# Altium PCB ScreenAdapterBoard.PcbDoc
Units mil, origin at the board's own origin, x right, y up, seen from the top; angles counter-clockwise.
Board outline 1293.31 x 2254 mil, 2 copper layers (Top Layer, Bottom Layer); 9 components, 15 nets, 53 pads, 12 vias.
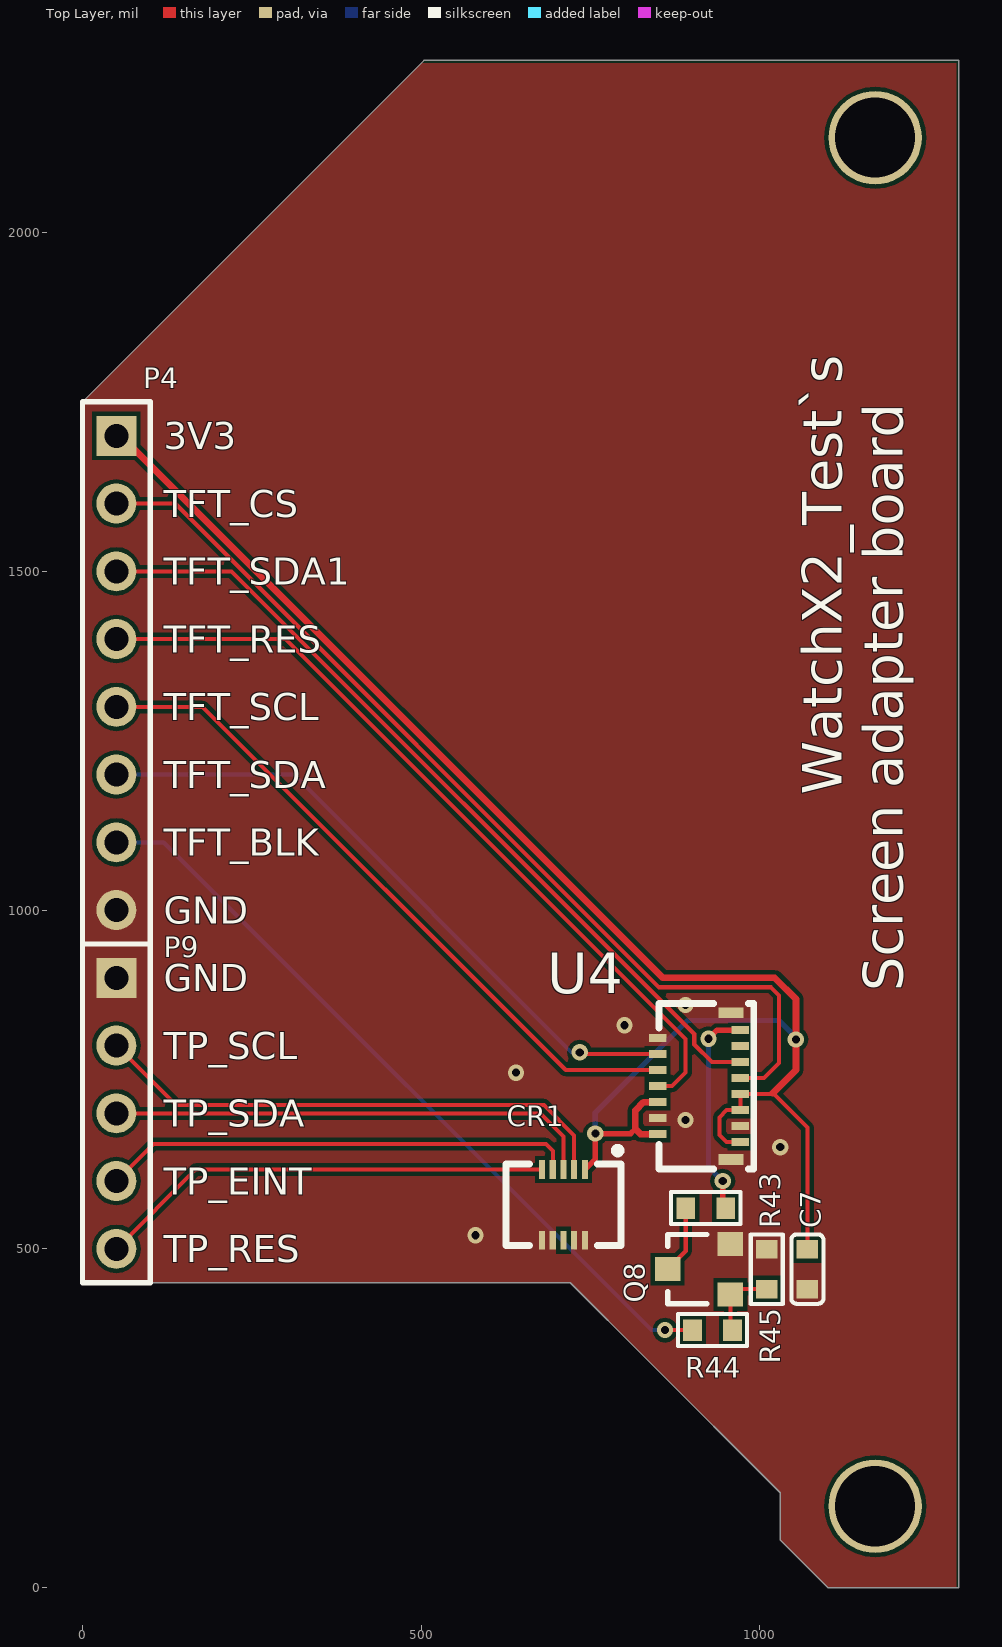
[diagram p0: Top Layer view]
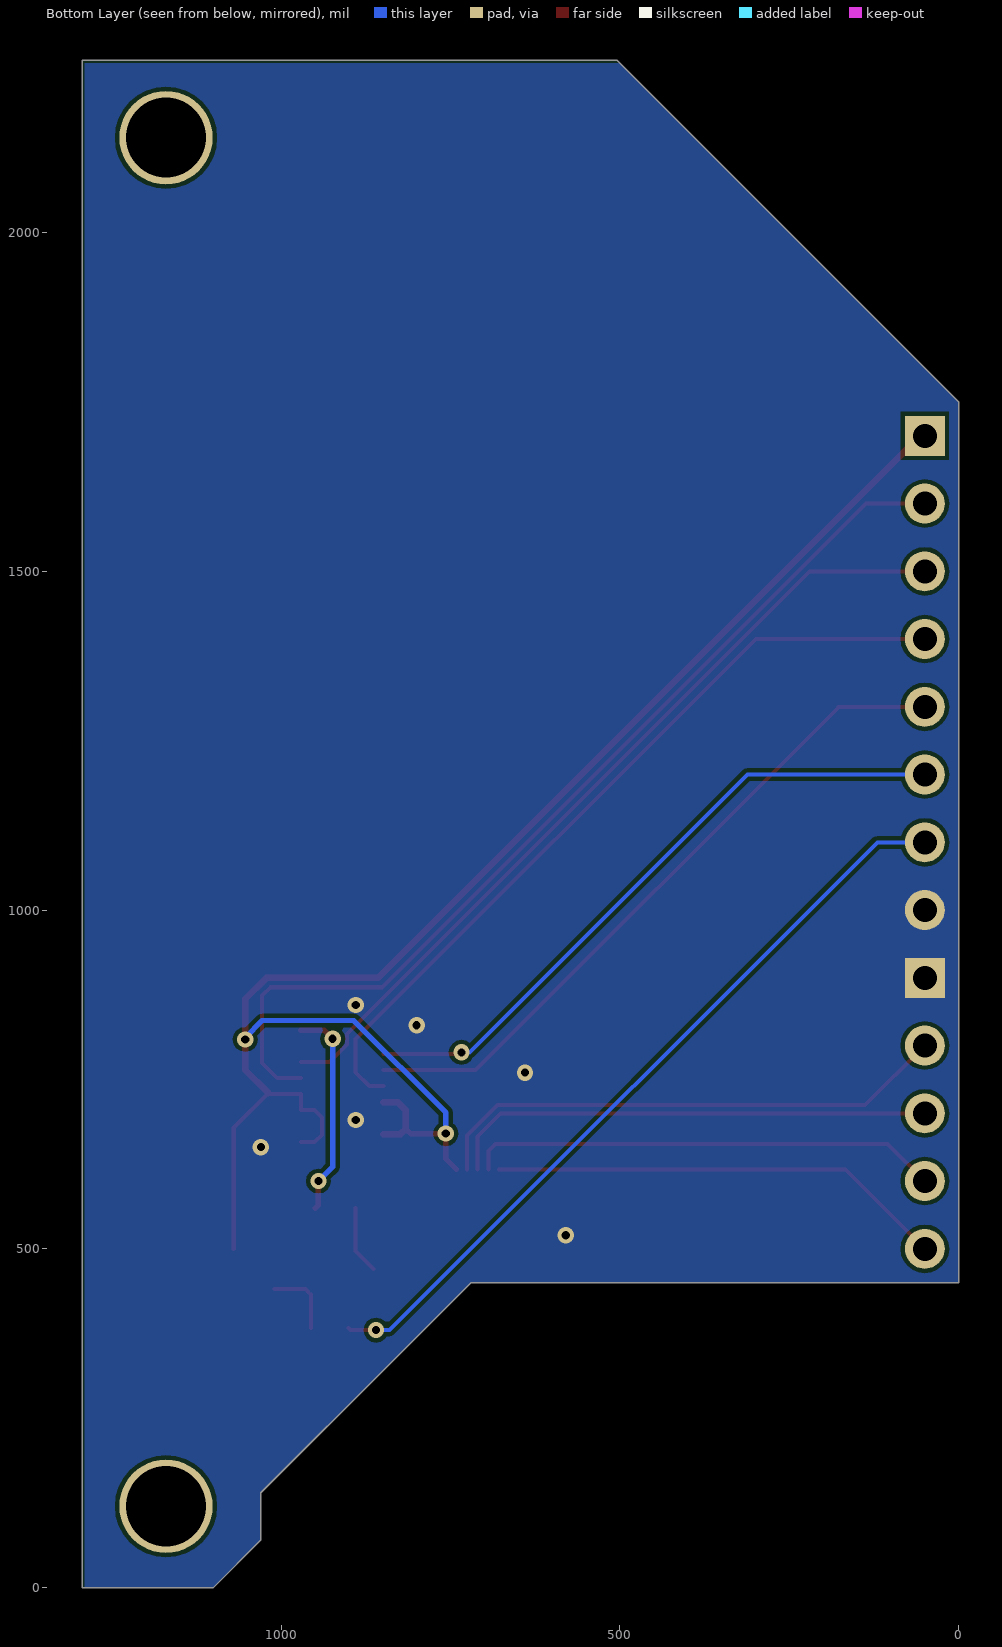
[diagram p1: Bottom Layer view, seen from below]
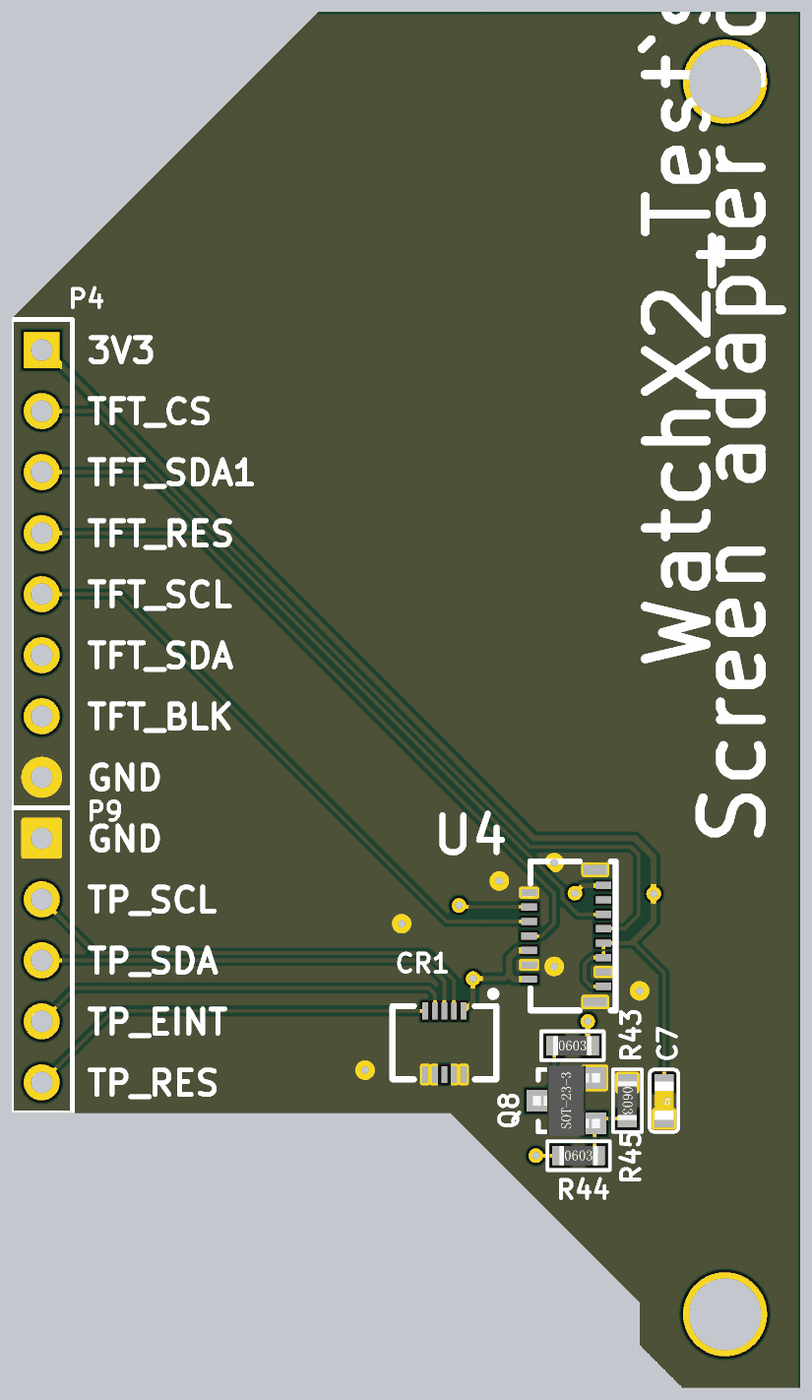
[diagram p2: 3D render of the assembled board from above, using the file's embedded part models]

## Layer stack, top to bottom
Top Solder: solder mask 0.4, Solder Resist, Dk 3.5
Top Layer: signal copper 1.4
Dielectric 1: dielectric 12.6, FR-4, Dk 4.8
Bottom Layer: signal copper 1.4
Bottom Solder: solder mask 0.4, Solder Resist, Dk 3.5

## Board outline
0,450 0,1750 504,2254 1293.31,2254 1293.31,0 1100,0 1030,70 1030,140 832.5,337.5 720,450

## Design rules (kind name [scope] priority, off if disabled: settings)
Clearance [All] p1: gap=6
ComponentClearance [All] p1 off: gap=10 collisioncheckmode=3 verticalgap=10 showdistances=FALSE
HoleSize [All] p1 off: absolutevalues=TRUE maxlimit=100 minlimit=1 maxpercent=80.000 minpercent=20.000
HoleToHoleClearance [All] p1 off: gap=10 allowstackedmicrovias=TRUE
LayerPairs [All] p1 off: enforce=TRUE
MinimumSolderMaskSliver [All] p1 off: minsoldermaskwidth=10
NetAntennae [All] p1 off: netantennaetolerance=0
PlaneConnect [All] p1: planeconnectstyle=Direct reliefexpansion=20 reliefentries=4 reliefconductorwidth=10 reliefairgap=10
PolygonConnect [All] p1: connectstyle=Direct reliefconductorwidth=10 reliefentries=4 polygonreliefangle="90 Angle" airgapwidth=10
RoutingVias [All] p1: holewidth=12 width=24 viastyle="Through Hole" minholewidth=12 minwidth=24 maxholewidth=12 maxwidth=24
SilkToSilkClearance [All] p1 off: silktosilkclearance=10
SilkToSolderMaskClearance [IsPad] p1 off: minsilkscreentomaskgap=10 clearancetoexposedcopper=TRUE
SolderMaskExpansion [All] p1: expansion=4
Width [All] p1: maxlimit=200 minlimit=6 preferedwidth=10
21 further rules are at their usual default settings.

## Components (designator, comment, footprint, x,y, rotation, side; value= is the part's Value field where it differs from the comment)
C7 "105" 电容_C0603 1070,470 r270 top
CR1 "CR10P" "CONN RCPT 10POS 0.4MM" 700,555 r180 top
P4 "Header 8" HDR1X8 50,1700 r270 top
P9 "Header 5" HDR1X5 50,900 r270 top
Q8 "S8050" 三极管_SOT-23 910,470 r90 top
R43 "10R" 电阻_R0603 920,560 r0 top
R44 "1K" 电阻_R0603 930,380 r0 top
R45 "10K" 电阻_R0603 1010,470 r270 top
U4 "TFT" FPC-0.30mm-15P 910,740 r90 top

## Footprints (in the part's own frame and the unit in brackets; to place one, negate y for a bottom-side part, rotate by r counter-clockwise, add the part's x,y. Pads: shape width x height; smd on the part's side, far side on the other; paste and mask are expansions set on the pad)
"CONN RCPT 10POS 0.4MM" [mm] "板对板连接器"
  rect 0.23x0.7 smd: 1(-1.054,-1.579) 2(-0.654,-1.579) 3(-0.254,-1.579) 4(0.146,-1.579) 5(0.546,-1.579) 6(0.546,1.071) 7(0.146,1.071) 8(-0.254,1.071) 9(-0.654,1.071) 10(-1.054,1.071)
  silkscreen extent -2.41,-2.41 1.91,1.27
FPC-0.30mm-15P [mm] "FPC翻盖式 下接"
  rect 0.3x0.65 smd: 1(2.1,-1.55) 2(1.8,1.55) 3(1.5,-1.55) 4(1.2,1.55) 5(0.9,-1.55) 6(0.6,1.55) 7(0.3,-1.55) 8(0,1.55) 9(-0.3,-1.55) 10(-0.6,1.55) 11(-0.9,-1.55) 12(-1.2,1.55) 13(-1.5,-1.55) 14(-1.8,1.55) 15(-2.1,-1.55)
  rect 0.4x0.95 smd: 16(-2.75,-1.2) 17(2.75,-1.2)
  silkscreen extent -3.1,-2.05 3.1,1.5
HDR1X5 [mm] "Connector; Header; 5 Position"
  rect 1.5x1.5 hole 0.9: 1(0,0)
  round 1.5 hole 0.9: 2(2.54,0) 3(5.08,0) 4(7.62,0) 5(10.16,0)
  silkscreen extent -1.27,-1.27 11.43,1.27
HDR1X8 [mm] "Connector; Header; 8 Position"
  rect 1.5x1.5 hole 0.9: 1(0,0)
  round 1.5 hole 0.9: 2(2.54,0) 3(5.08,0) 4(7.62,0) 5(10.16,0) 6(12.7,0) 7(15.24,0) 8(17.78,0)
  silkscreen extent -1.27,-1.27 19.05,1.27
三极管_SOT-23 [mm]
  rect 0.9x0.95 smd: 1(-0.95,-1.175) 2(0,1.175) 3(0.95,-1.175)
  silkscreen extent -1.3,-0.3 1.3,1.18, body extent -1.45,-1.4 1.45,1.4, height 1.2
电容_C0603 [mm]
  rect 0.7x0.8 smd: 1(-0.75,0) 2(0.75,0)
  silkscreen extent -1.3,-0.6 1.3,0.6, body extent -0.8,-0.4 0.8,0.4, height 0.3
电阻_R0603 [mm]
  rect 0.7x0.8 smd: 1(-0.75,0) 2(0.75,0)
  silkscreen extent -1.3,-0.6 1.3,0.6, body extent -0.8,-0.4 0.8,0.4, height 0.45

## Part data
C7: library part cap
CR1: library part "CONN RCPT 10P", "板对板连接器"
P4: "Header, 8-Pin"
P9: "Header, 5-Pin"
Q8: library part Triode-NPN
R43 R44 R45: library part Res
U4: library part TFT_IPS1-1.54寸240*240-AML015410V1, "IPS电容式触摸屏"

## Free pads (board coordinates)
  round 137.8 hole 118.11: 0(1170,120) 1(1170,2140)

## Via types
v1: diameter 24, hole 12, Top Layer to Bottom Layer, 12 vias

## Nets (pads, with @x,y where several pads share a name; then routed paths per layer and width w, separated by ;. In a path a pad name is that pad's centre, name@x,y a point inside that pad or via, vN(x,y) a via of type N, cw(c..) or ccw(c..) an arc to the next point about the centre after c; other vN are vias at no path point)
GND: C7.2 CR1.6 CR1.7 CR1.9 CR1.10 P4.8 P9.1 Q8.3 R45.1 U4.2 U4.12 U4.13 U4.16 U4.17
  other v1: 580,520 1030,650 890,690 640,760 800,830 890,860
NetQ8_1: Q8.1 R44.2 R45.2 | length 101.7
  Top Layer w6: R44.2@956.26,383.27 Q8.1 ; Q8.1@959.53,435.87 964.13,440.47 R45.2
NetQ8_2: Q8.2 R43.1 | length 101.1
  Top Layer w6: Q8.2 890.47,496.73 R43.1
SCREEN_VCC: C7.1 CR1.1 P4.1 U4.9 U4.10 U4.11 U4.14 U4.15 | length 2536.4
  Top Layer w6: U4.15 950.68,657.32 940,668 940,694 950.57,704.57 U4.11 U4.9 1019,728.19 ; 1019,730 1070,679 C7.1
  Top Layer w8: CR1.1 757,632.66 v1(757,670) 809,670 816,677
  Top Layer w10: P4.1 56.77,1700 856.77,900 1021.8,900 1053,868.8 v1(1053,809) 1053,764 1019,730 ; U4.14 823.87,669.13 816,677 816,704 828.38,716.38 U4.10
  Bottom Layer w8: v1(757,670) 757,701 893,837 1028,837 v1@1053,812
TFT_BLK: P4.7 R44.1 | length 1149.9
  Top Layer w6: v1(860,380) 897.47,380 R44.1@900.47,383
  Bottom Layer w6: P4.7 120,1100 840,380 v1(860,380)
TFT_CS: P4.2 U4.7 | length 1444.9
  Top Layer w6: P4.2 136.97,1600 850.97,886 1016,886 1028,874 1028,774 1005.81,751.81 U4.7
TFT_LEDK: R43.2 U4.1 | length 312.9
  Top Layer w8: v1(924,810) 936.68,822.68 U4.1 ; v1(945,600) 945,564.53 R43.2
  Bottom Layer w8: v1(924,810) 924,621 v1(945,600)
TFT_RES: P4.4 U4.8 | length 1183.3
  Top Layer w6: P4.4 299.35,1400 890,809.35 890,760 870,740 U4.8
TFT_SCL: P4.5 U4.6 | length 1021.2
  Top Layer w6: P4.5 176.97,1300 713.35,763.62 U4.6
TFT_SDA: P4.6 U4.4 | length 969.9
  Top Layer w6: v1(734,790) 736.76,787.24 U4.4
  Bottom Layer w6: P4.6 312,1200 722,790 v1(734,790)
TFT_SDA1: P4.3 U4.5 | length 1230.3
  Top Layer w6: P4.3 220,1500 903,817 903,801.3 928.87,775.43 U4.5
TP_EINT: CR1.4 P9.4 | length 698.5
  Top Layer w6: P9.4 104.76,654.76 684,654.76 694.26,644.5 CR1.4
TP_RES: CR1.5 P9.5 | length 677
  Top Layer w6: P9.5 167.16,617.16 CR1.5
TP_SCL: CR1.2 P9.2 | length 780.8
  Top Layer w6: P9.2 138,712 680.97,712 725.75,667.22 CR1.2
TP_SDA: CR1.3 P9.3 | length 722.9
  Top Layer w6: P9.3 676,700 710,666 CR1.3
pads on no net: CR1.8 U4.3

## Polygon pours and split planes (outlines as drawn)
GND on Top Layer "GND" (solid, pour order 0): 0,450 720,450 1030,140 1030,70 1100,0 1290,0 1290,2250 500,2250 0,1750
GND on Bottom Layer "GND" (solid, pour order 2): 0,1750 0,450 720,450 1030,140 1030,70 1100,0 1290,0 1290,2250 500,2250

## Silkscreen, mask and mechanical layers (free items; w line width, h text height)
Top Overlay:
  text "3V3" at 120,1680 h40
  text "TFT_CS" at 120,1580 h40
  text "TFT_SDA1" at 120,1480 h40
  text "TFT_RES" at 120,1380 h40
  text "TFT_SCL" at 120,1280 h40
  text "TFT_SDA" at 120,1180 h40
  text "WatchX2_Test`s" at 1140,1170 h100 r90
  text "TFT_BLK" at 120,1080 h40
  text "GND" at 120,980 h40
  text "GND" at 120,880 h40
  text "Screen adapter board" at 1230,880 h100 r90
  text "TP_SCL" at 120,780 h40
  text "TP_SDA" at 120,680 h40
  text "TP_EINT" at 120,580 h40
  text "TP_RES" at 120,480 h40
Bottom Solder:
  drawing of 583 lines, arcs and shapes, not listed
  text "No.021" at 929,2070 h80
Mechanical 1:
  the board outline again, w6